# Altium PCB PCB2.PcbDoc
Units mil, origin at the board's own origin, x right, y up, seen from the top; angles counter-clockwise.
Board outline 6000 x 4000 mil, 2 copper layers (Top Layer, Bottom Layer); 100 components, 51 nets, 200 pads, 0 vias.
Unrouted connection lines stored in the file: 95.
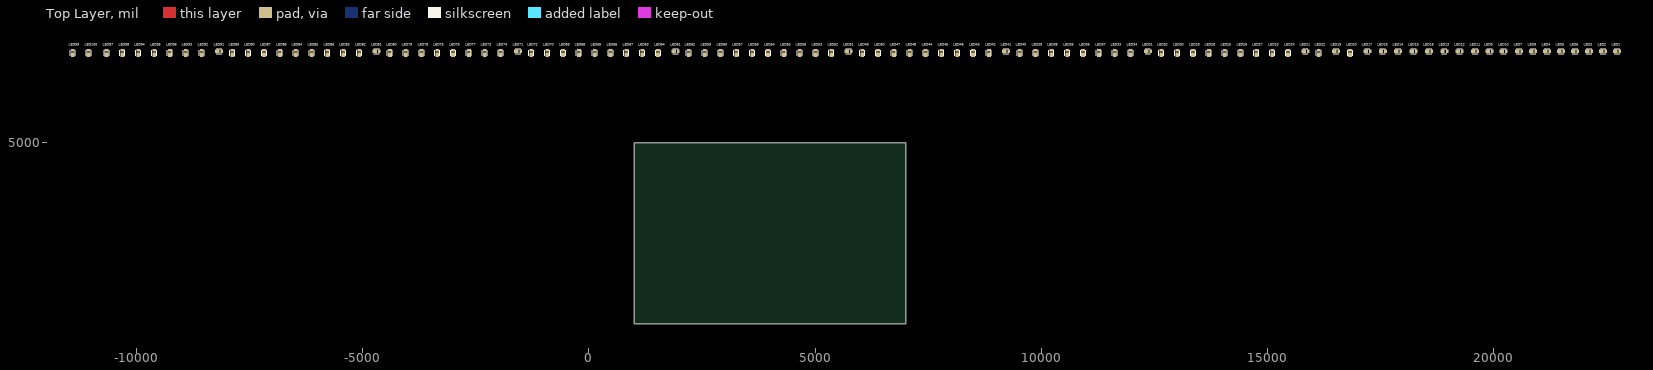
[diagram p0: Top Layer view]
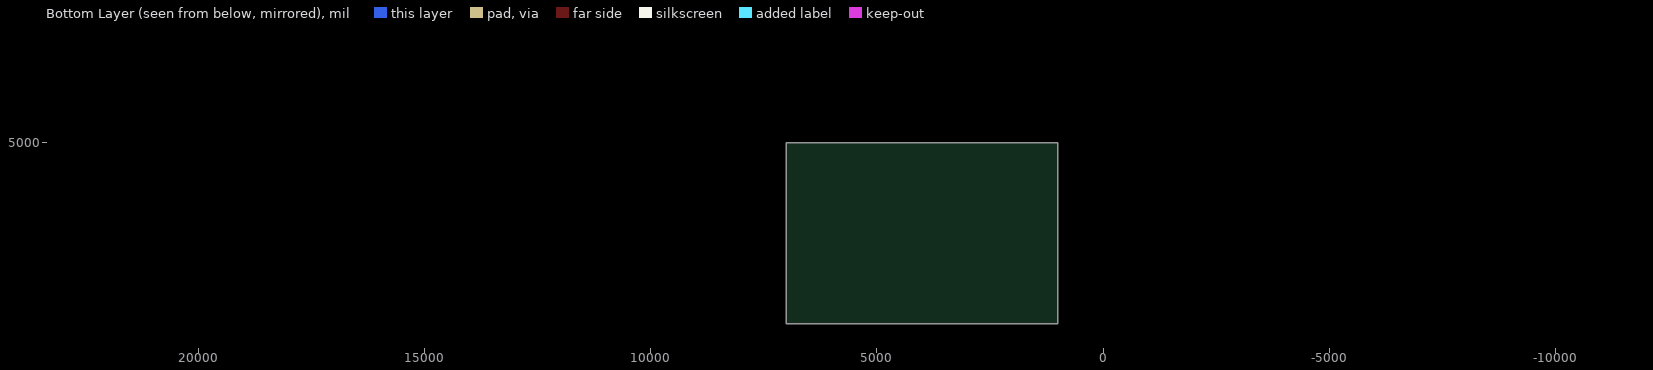
[diagram p1: Bottom Layer view, seen from below]

## Layer stack, top to bottom
Top Solder: solder mask 0.4, Solder Resist, Dk 3.5
Top Layer: signal copper 1.4
Dielectric 1: dielectric 12.6, FR-4, Dk 4.8
Bottom Layer: signal copper 1.4
Bottom Solder: solder mask 0.4, Solder Resist, Dk 3.5

## Board outline
1000,1000 7000,1000 7000,5000 1000,5000

## Design rules (kind name [scope] priority, off if disabled: settings)
Clearance [All] p1: gap=10 ignorepadtopadclearanceinfootprint=FALSE except(0: Arc-Hole Track-Hole SMDPad-Hole THPad-Hole Via-Hole Fill-Hole Poly-Hole Region-Hole Text-Hole)
PolygonConnect [All] p1: connectstyle=Relief reliefconductorwidth=10 reliefentries=4 polygonreliefangle="90 Angle" airgapwidth=10
RoutingVias [All] p1: holewidth=28 width=50 viastyle="Through Hole" minholewidth=28 minwidth=50 maxholewidth=28 maxwidth=50
SolderMaskExpansion [All] p1: expansion=4 istentingtop=FALSE
Width [All] p1: maxlimit=10 minlimit=10 preferedwidth=10
30 further rules are at their usual default settings.

## Components (designator, comment, footprint, x,y, rotation, side; value= is the part's Value field where it differs from the comment)
LED1 "ASMW-LA00-AUW0E" ASMWLA00AUW0E 22722.2,7015 r0 top
LED2 "ASMW-LA00-AUW0E" ASMWLA00AUW0E 22412.2,7015 r0 top
LED3 "ASMW-LA00-AUW0E" ASMWLA00AUW0E 22102.2,7015 r0 top
LED4 "ASMW-LA00-AUW0E" ASMWLA00AUW0E 21172.2,7015 r0 top
LED5 "ASMW-LA00-AUW0E" ASMWLA00AUW0E 21482.2,7015 r0 top
LED6 "ASMW-LA00-AUW0E" ASMWLA00AUW0E 21792.2,7015 r0 top
LED7 "ASMW-LA00-AUW0E" ASMWLA00AUW0E 20552.2,7015 r0 top
LED8 "ASMW-LA00-AUW0E" ASMWLA00AUW0E 20862.2,7015 r0 top
LED9 "ASMW-LA00-AUW0E" ASMWLA00AUW0E 19902.2,7015 r0 top
LED10 "ASMW-LA00-AUW0E" ASMWLA00AUW0E 20212.2,7015 r0 top
LED11 "ASMW-LA00-AUW0E" ASMWLA00AUW0E 19582.2,7015 r0 top
LED12 "ASMW-LA00-AUW0E" ASMWLA00AUW0E 19242.2,7015 r0 top
LED13 "ASMW-LA00-AUW0E" ASMWLA00AUW0E 18902.2,7015 r0 top
LED14 "ASMW-LA00-AUW0E" ASMWLA00AUW0E 17882.2,7015 r0 top
LED15 "ASMW-LA00-AUW0E" ASMWLA00AUW0E 18222.2,7015 r0 top
LED16 "ASMW-LA00-AUW0E" ASMWLA00AUW0E 18562.2,7015 r0 top
LED17 "ASMW-LA00-AUW0E" ASMWLA00AUW0E 17202.2,7015 r0 top
LED18 "ASMW-LA00-AUW0E" ASMWLA00AUW0E 17542.2,7015 r0 top
LED19 "ASMW-LA00-AUW0E" ASMWLA00AUW0E 16512.2,7015 r0 top
LED20 "ASMW-LA00-AUW0E" ASMWLA00AUW0E 16822.2,6980 r90 top
LED21 "ASMW-LA00-AUW0E" ASMWLA00AUW0E 15832.2,7015 r0 top
LED22 "ASMW-LA00-AUW0E" ASMWLA00AUW0E 16132.2,6980 r90 top
LED23 "ASMW-LA00-AUW0E" ASMWLA00AUW0E 15102.2,6980 r90 top
LED24 "ASMW-LA00-AUW0E" ASMWLA00AUW0E 15452.2,6980 r90 top
LED25 "ASMW-LA00-AUW0E" ASMWLA00AUW0E 14052.2,6980 r90 top
LED26 "ASMW-LA00-AUW0E" ASMWLA00AUW0E 14402.2,6980 r90 top
LED27 "ASMW-LA00-AUW0E" ASMWLA00AUW0E 14752.2,6980 r90 top
LED28 "ASMW-LA00-AUW0E" ASMWLA00AUW0E 13702.2,6980 r90 top
LED29 "ASMW-LA00-AUW0E" ASMWLA00AUW0E 13352.2,6980 r90 top
LED30 "ASMW-LA00-AUW0E" ASMWLA00AUW0E 13002.2,6980 r90 top
LED31 "ASMW-LA00-AUW0E" ASMWLA00AUW0E 12352.2,7015 r0 top
LED32 "ASMW-LA00-AUW0E" ASMWLA00AUW0E 12652.2,6980 r90 top
LED33 "ASMW-LA00-AUW0E" ASMWLA00AUW0E 11622.2,6980 r90 top
LED34 "ASMW-LA00-AUW0E" ASMWLA00AUW0E 11972.2,6980 r90 top
LED35 "ASMW-LA00-AUW0E" ASMWLA00AUW0E 10572.2,6980 r90 top
LED36 "ASMW-LA00-AUW0E" ASMWLA00AUW0E 10922.2,6980 r90 top
LED37 "ASMW-LA00-AUW0E" ASMWLA00AUW0E 11272.2,6980 r90 top
LED38 "ASMW-LA00-AUW0E" ASMWLA00AUW0E 10222.2,6980 r90 top
LED39 "ASMW-LA00-AUW0E" ASMWLA00AUW0E 9872.2,6980 r90 top
LED40 "ASMW-LA00-AUW0E" ASMWLA00AUW0E 9522.2,6980 r90 top
LED41 "ASMW-LA00-AUW0E" ASMWLA00AUW0E 9222.2,7015 r0 top
LED42 "ASMW-LA00-AUW0E" ASMWLA00AUW0E 8842.2,6980 r90 top
LED43 "ASMW-LA00-AUW0E" ASMWLA00AUW0E 8492.2,6980 r90 top
LED44 "ASMW-LA00-AUW0E" ASMWLA00AUW0E 7442.2,6980 r90 top
LED45 "ASMW-LA00-AUW0E" ASMWLA00AUW0E 7792.2,6980 r90 top
LED46 "ASMW-LA00-AUW0E" ASMWLA00AUW0E 8142.2,6980 r90 top
LED47 "ASMW-LA00-AUW0E" ASMWLA00AUW0E 6742.2,6980 r90 top
LED48 "ASMW-LA00-AUW0E" ASMWLA00AUW0E 7092.2,6980 r90 top
LED49 "ASMW-LA00-AUW0E" ASMWLA00AUW0E 6042.2,6980 r90 top
LED50 "ASMW-LA00-AUW0E" ASMWLA00AUW0E 6392.2,6980 r90 top
LED51 "ASMW-LA00-AUW0E" ASMWLA00AUW0E 5742.2,7015 r0 top
LED52 "ASMW-LA00-AUW0E" ASMWLA00AUW0E 5362.2,6980 r90 top
LED53 "ASMW-LA00-AUW0E" ASMWLA00AUW0E 5012.2,6980 r90 top
LED54 "ASMW-LA00-AUW0E" ASMWLA00AUW0E 3962.2,6980 r90 top
LED55 "ASMW-LA00-AUW0E" ASMWLA00AUW0E 4312.2,6980 r90 top
LED56 "ASMW-LA00-AUW0E" ASMWLA00AUW0E 4662.2,6980 r90 top
LED57 "ASMW-LA00-AUW0E" ASMWLA00AUW0E 3262.2,6980 r90 top
LED58 "ASMW-LA00-AUW0E" ASMWLA00AUW0E 3612.2,6980 r90 top
LED59 "ASMW-LA00-AUW0E" ASMWLA00AUW0E 2562.2,6980 r90 top
LED60 "ASMW-LA00-AUW0E" ASMWLA00AUW0E 2912.2,6980 r90 top
LED61 "ASMW-LA00-AUW0E" ASMWLA00AUW0E 1917.2,7015 r0 top
LED62 "ASMW-LA00-AUW0E" ASMWLA00AUW0E 2212.2,6980 r90 top
LED63 "ASMW-LA00-AUW0E" ASMWLA00AUW0E 1182.2,6980 r90 top
LED64 "ASMW-LA00-AUW0E" ASMWLA00AUW0E 1532.2,6980 r90 top
LED65 "ASMW-LA00-AUW0E" ASMWLA00AUW0E 132.2,6980 r90 top
LED66 "ASMW-LA00-AUW0E" ASMWLA00AUW0E 482.2,6980 r90 top
LED67 "ASMW-LA00-AUW0E" ASMWLA00AUW0E 832.2,6980 r90 top
LED68 "ASMW-LA00-AUW0E" ASMWLA00AUW0E -217.8,6980 r90 top
LED69 "ASMW-LA00-AUW0E" ASMWLA00AUW0E -567.8,6980 r90 top
LED70 "ASMW-LA00-AUW0E" ASMWLA00AUW0E -917.8,6980 r90 top
LED71 "ASMW-LA00-AUW0E" ASMWLA00AUW0E -1562.8,7015 r0 top
LED72 "ASMW-LA00-AUW0E" ASMWLA00AUW0E -1267.8,6980 r90 top
LED73 "ASMW-LA00-AUW0E" ASMWLA00AUW0E -2297.8,6980 r90 top
LED74 "ASMW-LA00-AUW0E" ASMWLA00AUW0E -1947.8,6980 r90 top
LED75 "ASMW-LA00-AUW0E" ASMWLA00AUW0E -3347.8,6980 r90 top
LED76 "ASMW-LA00-AUW0E" ASMWLA00AUW0E -2997.8,6980 r90 top
LED77 "ASMW-LA00-AUW0E" ASMWLA00AUW0E -2647.8,6980 r90 top
LED78 "ASMW-LA00-AUW0E" ASMWLA00AUW0E -3692.8,6980 r90 top
LED79 "ASMW-LA00-AUW0E" ASMWLA00AUW0E -4042.8,6980 r90 top
LED80 "ASMW-LA00-AUW0E" ASMWLA00AUW0E -4392.8,6980 r90 top
LED81 "ASMW-LA00-AUW0E" ASMWLA00AUW0E -4692.8,7015 r0 top
LED82 "ASMW-LA00-AUW0E" ASMWLA00AUW0E -5072.8,6980 r90 top
LED83 "ASMW-LA00-AUW0E" ASMWLA00AUW0E -5422.8,6980 r90 top
LED84 "ASMW-LA00-AUW0E" ASMWLA00AUW0E -6472.8,6980 r90 top
LED85 "ASMW-LA00-AUW0E" ASMWLA00AUW0E -6122.8,6980 r90 top
LED86 "ASMW-LA00-AUW0E" ASMWLA00AUW0E -5772.8,6980 r90 top
LED87 "ASMW-LA00-AUW0E" ASMWLA00AUW0E -7172.8,6980 r90 top
LED88 "ASMW-LA00-AUW0E" ASMWLA00AUW0E -6822.8,6980 r90 top
LED89 "ASMW-LA00-AUW0E" ASMWLA00AUW0E -7872.8,6980 r90 top
LED90 "ASMW-LA00-AUW0E" ASMWLA00AUW0E -7522.8,6980 r90 top
LED91 "ASMW-LA00-AUW0E" ASMWLA00AUW0E -8172.8,7015 r0 top
LED92 "ASMW-LA00-AUW0E" ASMWLA00AUW0E -8552.8,6980 r90 top
LED93 "ASMW-LA00-AUW0E" ASMWLA00AUW0E -8902.8,6980 r90 top
LED94 "ASMW-LA00-AUW0E" ASMWLA00AUW0E -9952.8,6980 r90 top
LED95 "ASMW-LA00-AUW0E" ASMWLA00AUW0E -9602.8,6980 r90 top
LED96 "ASMW-LA00-AUW0E" ASMWLA00AUW0E -9252.8,6980 r90 top
LED97 "ASMW-LA00-AUW0E" ASMWLA00AUW0E -10652.8,6980 r90 top
LED98 "ASMW-LA00-AUW0E" ASMWLA00AUW0E -10302.8,6980 r90 top
LED99 "ASMW-LA00-AUW0E" ASMWLA00AUW0E -11402.8,6980 r90 top
LED100 "ASMW-LA00-AUW0E" ASMWLA00AUW0E -11052.8,6980 r90 top

## Footprints (in the part's own frame and the unit in brackets; to place one, negate y for a bottom-side part, rotate by r counter-clockwise, add the part's x,y. Pads: shape width x height; smd on the part's side, far side on the other; paste and mask are expansions set on the pad)
ASMWLA00AUW0E [mm]
  rect 2.49x2.1 smd: 1(-0.95,0)
  rect 1.42x2.1 smd: 2(1.595,0)
  silkscreen extent -1.5,-1.4 1.5,1.4, body extent -1.75,-1.4 1.75,1.4, height 1

## Part data
LED1 LED2 LED3 LED4 LED5 LED6 LED7 LED8 LED9 LED10 LED11 LED12 LED13 LED14 LED15 LED16 LED17 LED18 LED19 LED20 LED21 LED22 LED23 LED24 LED25 LED26 LED27 LED28 LED29 LED30 LED31 LED32 LED33 LED34 LED35 LED36 LED37 LED38 LED39 LED40 LED41 LED42 LED43 LED44 LED45 LED46 LED47 LED48 LED49 LED50 LED51 LED52 LED53 LED54 LED55 LED56 LED57 LED58 LED59 LED60 LED61 LED62 LED63 LED64 LED65 LED66 LED67 LED68 LED69 LED70 LED71 LED72 LED73 LED74 LED75 LED76 LED77 LED78 LED79 LED80 LED81 LED82 LED83 LED84 LED85 LED86 LED87 LED88 LED89 LED90 LED91 LED92 LED93 LED94 LED95 LED96 LED97 LED98 LED99 LED100: "LED", Manufacturer_Name="Avago Technologies", Mouser Part Number=630-ASMW-LA00-AUW0E, Datasheet Link=https://docs.broadcom.com/docs/ASMW-LXXX-DS100, Height=0.9mm, Manufacturer_Part_Number=ASMW-LA00-AUW0E, Mouser Price/Stock=https://www.mouser.co.uk/ProductDetail/Broadcom-Avago/ASMW-LA00-AUW0E?qs=Mv7BduZupUh3TD%252BqME6K1Q%3D%3D

## Nets (pads, with @x,y where several pads share a name; then routed paths per layer and width w, separated by ;. In a path a pad name is that pad's centre, name@x,y a point inside that pad or via, vN(x,y) a via of type N, cw(c..) or ccw(c..) an arc to the next point about the centre after c; other vN are vias at no path point)
NetLED1_1: LED1.1 LED2.2 LED11.1 LED12.2
NetLED1_2: LED1.2 LED11.2 LED22.1 LED32.1
NetLED2_1: LED2.1 LED6.2 LED12.1 LED16.2
NetLED3_1: LED3.1 LED4.2 LED13.1 LED14.2
NetLED3_2: LED3.2 LED5.1 LED13.2 LED15.1
NetLED4_1: LED4.1 LED8.2 LED14.1 LED18.2
NetLED5_2: LED5.2 LED6.1 LED15.2 LED16.1
NetLED7_1: LED7.1 LED10.2 LED17.1 LED20.2
NetLED7_2: LED7.2 LED8.1 LED17.2 LED18.1
NetLED9_1: LED9.1 LED19.1
NetLED9_2: LED9.2 LED10.1 LED19.2 LED20.1
NetLED21_1: LED21.1 LED22.2 LED31.1 LED32.2
NetLED21_2: LED21.2 LED24.1 LED31.2 LED34.1
NetLED23_1: LED23.1 LED24.2 LED33.1 LED34.2
NetLED23_2: LED23.2 LED27.1 LED33.2 LED37.1
NetLED25_1: LED25.1 LED26.2 LED35.1 LED36.2
NetLED25_2: LED25.2 LED29.1 LED35.2 LED39.1
NetLED26_1: LED26.1 LED28.2 LED36.1 LED38.2
NetLED27_2: LED27.2 LED28.1 LED37.2 LED38.1
NetLED29_2: LED29.2 LED30.1 LED39.2 LED40.1
NetLED30_2: LED30.2 LED40.2 LED49.1 LED59.1
NetLED41_1: LED41.1 LED42.2 LED51.1 LED52.2
NetLED41_2: LED41.2 LED51.2 LED62.1 LED72.1
NetLED42_1: LED42.1 LED46.2 LED52.1 LED56.2
NetLED43_1: LED43.1 LED44.2 LED53.1 LED54.2
NetLED43_2: LED43.2 LED45.1 LED53.2 LED55.1
NetLED44_1: LED44.1 LED48.2 LED54.1 LED58.2
NetLED45_2: LED45.2 LED46.1 LED55.2 LED56.1
NetLED47_1: LED47.1 LED50.2 LED57.1 LED60.2
NetLED47_2: LED47.2 LED48.1 LED57.2 LED58.1
NetLED49_2: LED49.2 LED50.1 LED59.2 LED60.1
NetLED61_1: LED61.1 LED62.2 LED71.1 LED72.2
NetLED61_2: LED61.2 LED64.1 LED71.2 LED74.1
NetLED63_1: LED63.1 LED64.2 LED73.1 LED74.2
NetLED63_2: LED63.2 LED67.1 LED73.2 LED77.1
NetLED65_1: LED65.1 LED66.2 LED75.1 LED76.2
NetLED65_2: LED65.2 LED69.1 LED75.2 LED79.1
NetLED66_1: LED66.1 LED68.2 LED76.1 LED78.2
NetLED67_2: LED67.2 LED68.1 LED77.2 LED78.1
NetLED69_2: LED69.2 LED70.1 LED79.2 LED80.1
NetLED70_2: LED70.2 LED80.2 LED89.1 LED99.1
NetLED81_1: LED81.1 LED82.2 LED91.1 LED92.2
NetLED81_2: LED81.2 LED91.2
NetLED82_1: LED82.1 LED86.2 LED92.1 LED96.2
NetLED83_1: LED83.1 LED84.2 LED93.1 LED94.2
NetLED83_2: LED83.2 LED85.1 LED93.2 LED95.1
NetLED84_1: LED84.1 LED88.2 LED94.1 LED98.2
NetLED85_2: LED85.2 LED86.1 LED95.2 LED96.1
NetLED87_1: LED87.1 LED90.2 LED97.1 LED100.2
NetLED87_2: LED87.2 LED88.1 LED97.2 LED98.1
NetLED89_2: LED89.2 LED90.1 LED99.2 LED100.1